# Altium PCB IP5568-MCU-188-3LED-ACL-V1.1.PcbDoc (part 2 of 2)
Units mm, origin at the board's own origin, x right, y up, seen from the top; angles counter-clockwise.
Board outline 55.37 x 39.29 mm, 4 copper layers (Top Layer, Mid-Layer 1, Mid-Layer 2, Bottom Layer); 97 components, 84 nets, 371 pads, 292 vias.
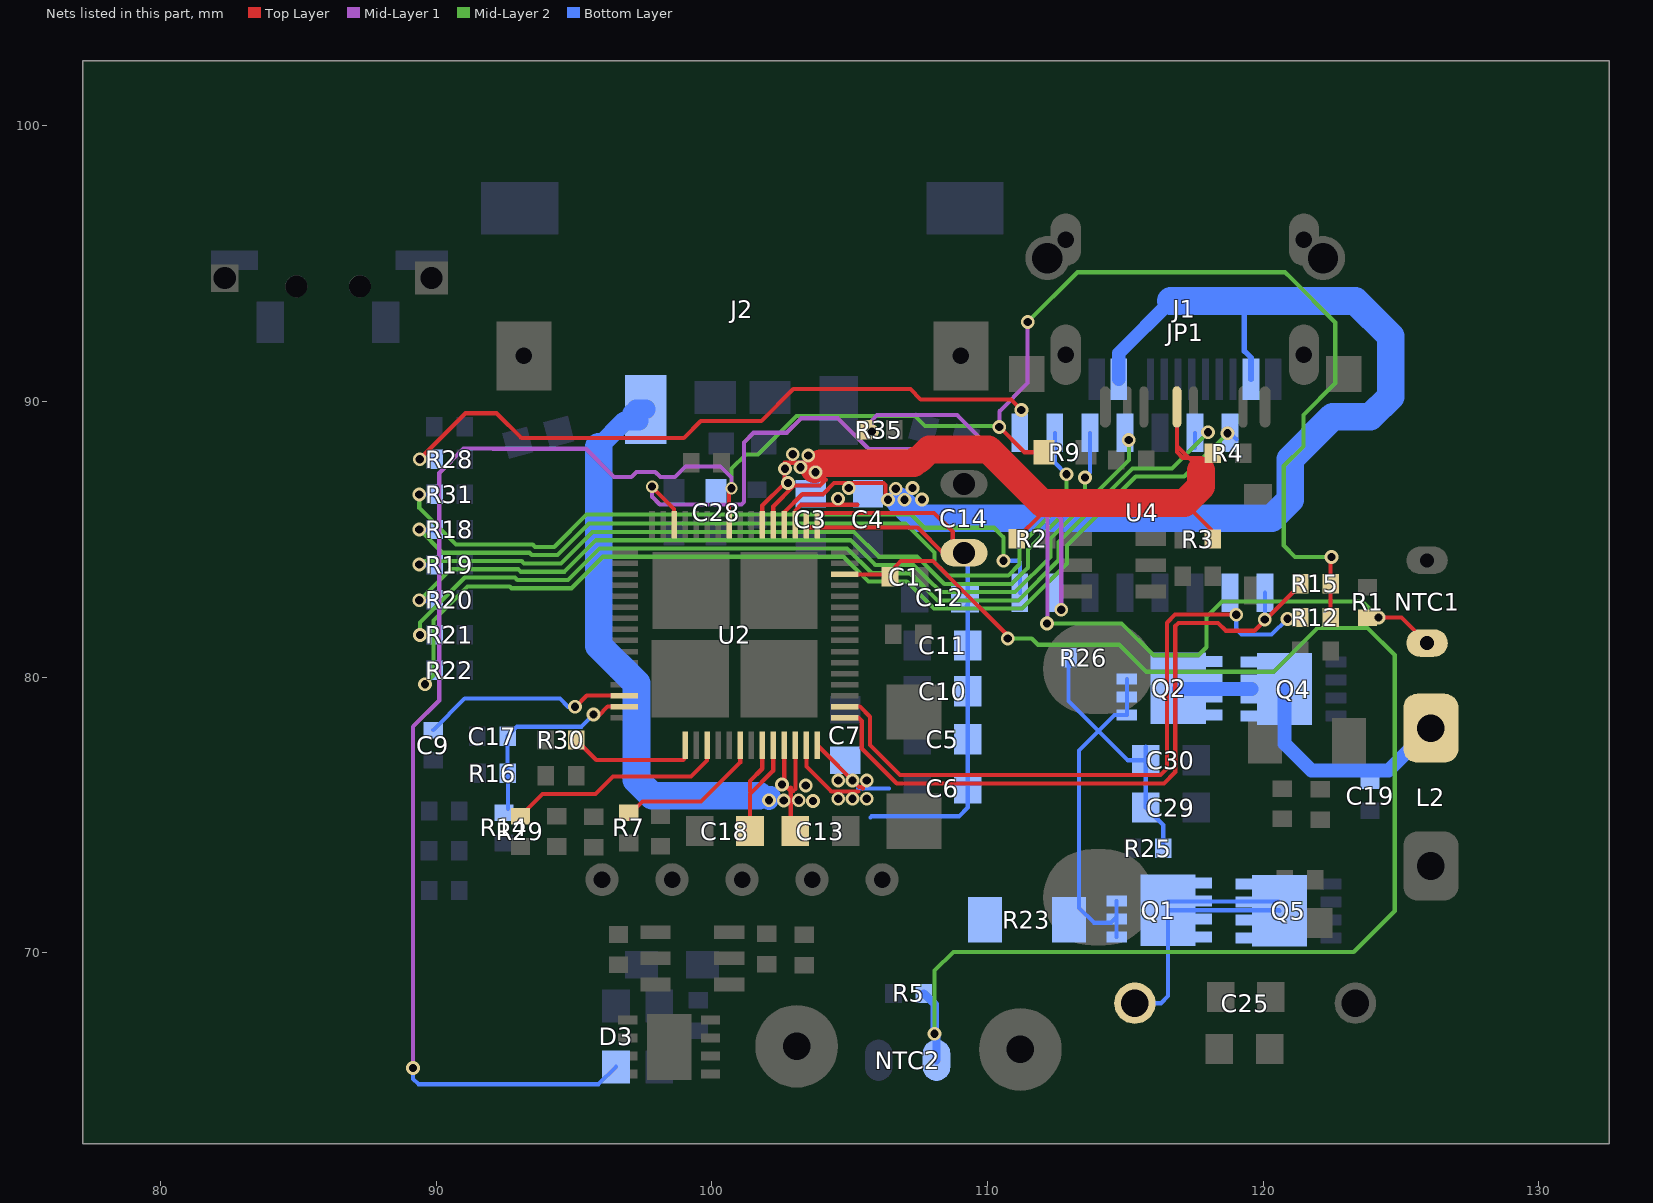
[diagram p4: the nets of this part, all layers, seen from the top]

## Via types
v1: diameter 0.5, hole 0.3, Top Layer to Bottom Layer, tented both sides, 287 vias
v2: diameter 0.45, hole 0.3, Top Layer to Bottom Layer, tented both sides, 5 vias

## Nets (pads, with @x,y where several pads share a name; then routed paths per layer and width w, separated by ;. In a path a pad name is that pad's centre, name@x,y a point inside that pad or via, vN(x,y) a via of type N, cw(c..) or ccw(c..) an arc to the next point about the centre after c; other vN are vias at no path point) (continued)
NTC1: C1.1 NTC2.1 R5.1 U2.14 | length 54.5
  Top Layer w0.15: U2.14@104.825,83.734 106.368,83.734 106.852,84.217 108.023,84.217 108.522,83.719 ; 108.552,83.688 v1@110.731,81.509
  Mid-Layer 2 w0.15: v1(108.077,67.069) 108.077,69.355 108.758,70.035 123.286,70.035 124.773,71.522 124.773,80.802 123.782,81.793 121.963,81.793 120.368,80.197 115.766,80.197 114.785,81.178 111.833,81.178 111.604,81.407 v1(110.731,81.407)
  Bottom Layer w0.3: R5.1@107.687,68.529 108.079,68.137 108.079,67.071 v1(108.077,67.069) ; NTC2.1@108.148,66.103 v1@108.148,67.069
NTC2: NTC1.1 R1.1 U2.30 | length 41.7
  Top Layer w0.15: v2(97.828,86.919) 97.828,86.906 98.625,86.109 U2.30@98.625,85.534 ; R1.1@123.787,82.165 125.021,82.165 NTC1.1@125.946,81.241
  Mid-Layer 1 w0.15: v2(97.828,86.919) 97.828,86.55 98.108,86.271 101.067,86.271 101.161,86.366 101.161,88.521 101.511,88.872 102.712,88.872 103.236,89.395 104.572,89.395 105.689,88.278 107.709,88.278 108.013,88.582 109.402,88.582 112.179,85.805 112.179,81.978 v1(112.154,81.953)
  Mid-Layer 2 w0.15: v1@112.052,82.055 v1@112.09,82.055 ; v1@112.09,81.978 v1@112.135,81.934 ; v1(112.154,81.953) 114.859,81.953 116.014,80.797 117.653,80.797 117.945,81.09 117.945,82.182 118.509,82.746 123.6,82.746 v1(124.181,82.165) ; NTC1.1@125.782,81.241 NTC1.1@125.946,81.241
PWM1: R28.1 U4.1 | length 24.5
  Top Layer w0.15: v1(89.395,87.909) 91.064,89.578 92.184,89.578 93.083,88.679 98.979,88.679 99.593,89.294 101.79,89.294 102.951,90.454 107.201,90.454 107.574,90.081 110.846,90.081 v1(111.227,89.7)
  Bottom Layer w0.15: v1(89.395,87.909) R28.1@89.938,87.909
PWM2: R31.1 U4.16 | length 26.2
  Mid-Layer 2 w0.15: v1(89.383,86.627) 89.383,86.144 90.71,84.817 93.499,84.817 93.586,84.729 94.278,84.729 95.452,85.903 107.232,85.903 107.709,85.425 110.231,85.425 110.579,85.077 v1(110.579,84.226)
  Bottom Layer w0.15: v1@89.391,86.635 R31.1@89.938,86.635 ; R31.1@89.938,86.606 R31.1@89.963,86.606 ; v1(110.579,84.226) 111.112,84.226 111.176,84.163 U4.16@111.176,83.066
PWM3: R35.1 U4.15 | length 12.2
  Mid-Layer 1 w0.15: v1(105.804,88.913) 105.804,89.319 105.994,89.51 108.255,89.51 108.899,89.51 112.674,85.734 v1(112.674,82.448)
SCL: R15.1 U2.1 U4.9 | length 25.4
  Top Layer w0.15: U2.1@104.825,78.5 U2.1@104.825,78.534 105.319,78.534 105.435,78.418 105.435,77.419 106.705,76.149 116.395,76.149 116.809,76.563 116.809,81.854 116.926,81.971 118.359,81.971 118.643,81.686 119.684,81.686 121.345,83.347 R15.1@121.345,83.388
  Bottom Layer w0.15: v1@120.066,82.105 U4.9@120.066,83.066
  other v1: 120.053,82.093
SDA: R12.1 U2.2 U4.10 | length 24.4
  Top Layer w0.15: U2.2@104.825,78.934 104.878,78.934 105.368,78.934 105.735,78.567 105.735,78.105 105.735,77.543 106.83,76.449 116.271,76.449 116.51,76.687 116.51,81.047 116.51,81.978 116.802,82.271 v1(119.024,82.271) ; v1@120.993,82.169 R12.1@121.345,82.169
  Bottom Layer w0.15: v1(119.024,82.271) 119.024,81.737 119.215,81.547 120.307,81.547 v1(120.879,82.118)
SEG1: R18.2 U4.2 | length 29.9
  Mid-Layer 2 w0.15: v1(89.383,85.357) 90.223,84.517 93.374,84.517 93.462,84.429 94.403,84.429 95.546,85.572 107.022,85.572 108.069,84.525 108.069,84.171 108.552,83.688 110.752,83.688 111.163,84.099 111.163,84.763 112.865,86.464 v1(112.865,87.363)
  Bottom Layer w0.15: v1@89.438,85.336 R18.2@89.938,85.336 ; U4.2@112.446,88.866 112.446,87.782 v1(112.865,87.363)
SEG2: R19.2 U4.3 | length 29.8
  Mid-Layer 2 w0.15: v1@89.513,84.217 93.098,84.217 93.186,84.129 94.527,84.129 95.67,85.272 105.153,85.272 106.051,84.374 107.442,84.374 108.428,83.388 110.876,83.388 111.463,83.975 111.463,84.638 113.538,86.713 v1(113.538,87.249)
  Bottom Layer w0.15: v1@89.438,84.066 R19.2@89.938,84.066 ; v1(113.538,87.249) 113.716,87.427 U4.3@113.716,88.866
  other v1: 89.383,84.087
SEG3: R20.2 U4.4 | length 31.2
  Mid-Layer 2 w0.15: v1(89.383,82.791) 90.508,83.917 92.974,83.917 93.061,83.829 94.651,83.829 95.794,84.972 105.029,84.972 105.927,84.074 107.318,84.074 107.805,83.586 108.304,83.088 111,83.088 112.281,84.368 112.281,85.032 115.126,87.876 v1(115.126,88.608) ; v1@115.095,88.608 v1(115.126,88.608) ; v1@115.112,88.594 v1(115.126,88.608)
  Bottom Layer w0.15: v1@89.438,82.77 R20.2@89.963,82.77
SEG4: R21.2 U4.6 | length 35
  Mid-Layer 2 w0.15: v1(89.408,81.534) 89.408,81.992 91.033,83.617 92.85,83.617 92.937,83.529 94.775,83.529 95.918,84.672 97.371,84.672 104.904,84.672 105.803,83.774 107.194,83.774 108.179,82.788 111.125,82.788 112.581,84.244 112.581,84.907 115.252,87.579 116.688,87.579 v1(117.996,88.887)
  Bottom Layer w0.15: v1@89.463,81.513 R21.2@89.988,81.513 ; U4.6@117.526,88.328 U4.6@117.526,88.866
SEG5: R22.2 U4.7 | length 37.1
  Mid-Layer 2 w0.15: v1(89.586,79.743) 89.903,80.061 89.903,82.063 91.132,83.292 92.665,83.292 92.728,83.229 94.9,83.229 96.043,84.372 104.78,84.372 105.679,83.474 107.069,83.474 108.055,82.488 111.249,82.488 112.881,84.12 112.881,84.783 115.377,87.279 117.137,87.279 v1(118.707,88.849)
  Bottom Layer w0.15: v1(89.586,79.743) 89.938,80.095 R22.2@89.938,80.217 ; R22.2@89.938,80.251 R22.2@89.938,80.217 ; R22.2@89.988,80.217 R22.2@89.938,80.217 ; U4.7@118.796,88.866 U4.7@119.029,88.633
SW1: C25.1 Q1.5 Q1.6 Q1.7 Q1.8 Q1.9 Q5.5 Q5.6 Q5.7 Q5.8 Q5.9 | length 12.5
  Bottom Layer w0.15: C25.1@115.342,68.174 116.294,68.174 116.551,68.43 Q1.9@116.551,71.547 120.574,71.547 Q5.9@120.596,71.525 ; Q1.9@116.551,71.865 Q5.9@120.562,71.865
SW2: C19.1 L2.2 Q2.5 Q2.6 Q2.7 Q2.8 Q2.9 Q4.5 Q4.6 Q4.7 Q4.8 Q4.9 | length 11
  Bottom Layer w0.5: Q2.9@116.942,79.576 119.574,79.576 ; Q4.9@120.774,79.576 120.774,77.6 121.755,76.619 124.553,76.619 L2.2@126.086,78.152
UPGATE1: R29.2 U2.54 | length 8.2
  Top Layer w0.15: R29.2@93.053,74.959 93.857,75.763 95.773,75.763 96.407,76.397 99.236,76.397 99.825,76.986 U2.54@99.825,77.534
UPGATE2: R30.2 U2.52 | length 5
  Top Layer w0.15: R30.2@95.076,77.724 95.803,76.997 96.418,76.997 ; 96.215,76.997 96.418,76.997 ; U2.52@99.025,77.534 99.025,77.064 98.958,76.997 96.418,76.997
V_DECODE: C9.1 U2.46 | length 7.7
  Top Layer w0.15: v1@95.044,78.92 95.458,79.334 U2.46@96.825,79.334
  Bottom Layer w0.15: C9.1@89.891,78.083 91.03,79.223 94.489,79.223 94.781,78.93 v1(95.034,78.93)
V_DET: C17.2 R14.1 R16.2 U2.47 | length 7.1
  Top Layer w0.15: v1@95.885,78.6 96.219,78.934 U2.47@96.825,78.934
  Bottom Layer w0.15: R16.2@92.587,76.53 C17.2@92.587,77.864 92.93,78.207 95.263,78.207 v1(95.707,78.651) ; R14.1@92.6,75.23 R16.2@92.6,76.517
VBRIGE: C29.2 C30.2 Q1.1 Q1.2 Q1.3 Q2.1 Q2.2 Q2.3 R23.2 R25.2 R26.2 | length 22.3
  Bottom Layer w0.15: R26.2@112.937,80.709 112.937,79.138 114.027,78.048 ; 113.322,76.556 113.322,75.73 ; Q1.1@114.684,70.577 Q1.2@114.684,71.227 Q1.3@114.684,71.877 ; Q1.2@114.684,71.295 114.484,71.095 113.855,71.095 113.322,71.628 113.322,75.73 ; Q2.3@115.053,79.929 Q2.2@115.053,79.279 Q2.1@115.053,78.628 114.608,78.628 114.027,78.048 ; C30.2@115.738,77.48 C30.2@115.738,76.987 ; R25.2@116.374,73.8 116.374,74.637 C29.2@115.738,75.273 C30.2@115.738,76.987 ; 113.322,75.73 113.322,77.343 114.027,78.048 ; 114.027,78.048 115.087,76.987 C30.2@115.738,76.987
VBUS: C4.1 J1.A4 J1.B4 U2.19 U2.20 | length 45.4
  Top Layer w0.15: U2.20@102.625,85.534 102.625,85.988 103.276,86.639 104.026,86.639 104.432,87.046 106.223,87.046 106.299,86.97 v1@106.299,86.552 ; 103.025,86.052 103.232,86.259 105.283,86.259
  Bottom Layer w0.2: 119.405,93.65 119.318,93.563 119.318,91.832 119.557,91.593 J1.B4@119.557,90.816
  Bottom Layer w0.5: J1.A4@114.757,90.816 114.757,91.753 116.654,93.65
  Bottom Layer w1: v1@106.808,86.387 107.432,85.763 120.307,85.763 120.981,86.437 120.981,87.91 122.517,89.446 123.888,89.446 124.625,90.183 124.625,92.367 123.342,93.65 119.405,93.65 116.654,93.65
  other v1: 106.388,86.436 106.985,86.436 104.572,86.474 107.62,86.449 106.667,86.843 104.965,86.868 107.277,86.868
VCC: C28.1 D3.K R9.1 R12.2 R15.2 U2.25 | length 87.1
  Top Layer w0.15: U2.25@100.625,85.534 v2@100.625,86.693 ; v1(110.426,89.078) 111.341,88.163 R9.1@112.039,88.163 R9.1@112.331,87.871 ; R12.2@122.445,82.169 122.445,82.779 R15.2@122.445,83.388 v1@122.445,84.366
  Mid-Layer 1 w0.15: v1(89.154,65.824) 89.154,78.207 90.106,79.159 90.106,87.414 90.99,88.298 92.051,88.298 92.058,88.29 95.428,88.29 96.449,87.269 97.075,87.269 97.258,87.452 97.942,87.452 98.134,87.261 98.653,87.261 99.035,87.643 100.317,87.643 100.711,87.249 v2(100.711,86.855) ; v1(110.426,89.078) 110.426,89.649 111.455,90.678 v1(111.455,92.888)
  Mid-Layer 2 w0.15: v2(100.711,86.855) 100.711,87.566 101.23,88.086 101.665,88.086 103.063,89.484 107.365,89.484 107.733,89.116 v1@110.388,89.116 ; v1(111.455,92.888) 113.261,94.693 115.715,94.693 120.793,94.693 121.003,94.483 122.614,92.872 122.614,90.668 121.458,89.512 121.458,88.379 120.747,87.668 120.747,84.777 121.158,84.366 v1(122.479,84.366)
  Bottom Layer w0.15: v1(89.154,65.824) 89.154,65.43 89.349,65.236 95.889,65.236 D3.K@96.52,65.867
VIN: C3.1 JP1.6 R2.2 R3.2 R4.2 U2.21 U2.22 | length 31.9
  Top Layer w0.15: U2.22@101.825,85.534 101.825,86.23 102.629,87.033 102.629,87.782 103.51,87.782 103.73,87.563 104.127,87.165 103.919,86.957 102.984,86.957 102.225,86.198 U2.21@102.225,85.534 U2.21@102.235,85.544 ; R2.2@111.058,85.026 111.974,85.942 111.974,86.322 ; 117.145,86.322 118.177,85.289 R3.2@118.177,85.014 ; 117.745,87.513 116.87,88.387 JP1.6@116.87,89.807 116.87,88.171 117.081,87.96 117.745,87.96
  Top Layer w1: v1@103.721,87.554 103.73,87.563 103.938,87.771 107.315,87.771 107.43,87.886 107.51,87.886 107.887,88.263 110.032,88.263 111.974,86.322 117.145,86.322 117.745,86.922 117.745,87.513
  other v1: 102.756,87.046 103.759,87.439 102.654,87.566 103.213,87.617 103.492,88.049 102.933,88.087
VOUT1: C13.2 J2.4 U2.61 U2.62 | length 25.3
  Top Layer w0.15: U2.61@102.625,77.534 102.625,76.102 102.794,75.933 ; 102.857,75.997 102.857,75.882 ; 102.959,75.882 102.857,75.882 ; 102.965,75.889 103.025,75.949 ; C13.2@102.974,74.473 102.857,74.59 102.857,75.882 ; 103.025,75.997 U2.62@103.025,77.534
  Bottom Layer w0.7: 95.898,88.367 96.825,89.294 J2.4@97.346,89.294 ; J2.4@97.085,89.554 97.251,89.72 J2.4@97.605,89.72 ; 101.714,75.705 102.133,75.705 102.07,75.641 v1(102.07,75.54)
  Bottom Layer w1: 95.898,88.367 95.898,81.143 97.263,79.778 97.263,76.281 97.839,75.705 101.714,75.705
  other v1: 103.67,75.514 102.603,75.527 103.149,75.54 103.403,76.073 102.54,76.111
VOUT2: C18.2 U2.59 U2.60 | length 5.3
  Top Layer w0.15: C18.2@101.381,74.422 101.381,75.765 102.225,76.609 U2.60@102.225,77.534 ; 101.381,75.854 101.381,76.235 101.825,76.679 U2.59@101.825,77.534
VSET: R7.1 U2.57 | length 5.5
  Top Layer w0.15: R7.1@96.926,75.074 97.057,75.074 97.481,75.497 99.609,75.497 101.025,76.913 U2.57@101.025,77.534
VSYS: C5.2 C6.2 C7.2 C10.2 C11.2 C12.1 C14.1 R23.1 U2.17 U2.18 U2.63 U2.64 | length 32.4
  Top Layer w0.15: U2.63@103.425,77.534 103.425,76.762 104.331,75.857 105.308,75.857 ; U2.18@103.425,85.534 103.526,85.433 107.467,85.433 108.387,84.513 C14.1@109.144,84.513 108.737,84.919 108.737,85.281 108.059,85.959 103.886,85.959 103.825,85.898 U2.17@103.825,85.534 ; U2.64@103.825,77.534 105.337,76.022 105.474,76.022 105.474,75.959
  Bottom Layer w0.15: 105.308,75.959 106.426,75.959 ; 105.753,74.917 105.791,74.955 108.966,74.955 109.281,75.27 C11.2@109.281,81.153 ; C14.1@109.144,84.513 109.281,84.376 C12.1@109.281,82.588 ; C12.1@109.233,82.54 C12.1@109.233,82.588 ; C11.2@109.281,80.835 C11.2@109.281,81.153 ; C12.1@109.281,82.54 C11.2@109.281,81.153
  other v1: 104.584,75.59 105.099,75.59 105.613,75.59 104.584,76.251 105.099,76.251 105.613,76.251
pads on no net: J1.0@114.267,92.134 J1.0@120.047,92.134 J1.A8 J1.B8 JP1.3 JP1.4 JP1.7 Q3.0 U1.3 U1.4 U2.15 U2.16 U2.49 U2.50 U2.51 U3.4 U4.8

## Polygon pours and split planes (outlines as drawn)
GND on Top Layer "Bottom Layer-No Net" (hatched Vertical grid 0.2 track 0.3, remove dead copper, pour order 1000): 131.381,100.99 76.124,100.99 75.171,100.038 75.641,99.568 75.641,99.085 75.641,63.741 77.165,62.217 77.356,62.027 77.546,62.027 130.327,62.027 133.566,65.265
COIL_V on Top Layer "Top Layer-No Net" (hatched 45Degree grid 0.2 track 0.3, remove dead copper, pour order 1020): 125.235,74.447 126.848,74.447 127.178,74.117 127.178,64.694 126.898,64.414 122.923,64.414 122.377,64.96 122.377,68.021 123.558,69.202 125.146,70.79 125.146,74.244
COIL_I on Top Layer "Top Layer-No Net" (hatched 45Degree grid 0.2 track 0.3, remove dead copper, pour order 1019): 123.419,80.543 122.987,80.543 122.339,79.896 122.339,77.559 122.39,77.508 122.822,77.076 123.228,77.076 123.228,77.406 123.469,77.648 123.317,77.8 123.317,79.362
COIL_I on Top Layer "Top Layer-No Net" (hatched 45Degree grid 0.2 track 0.3, remove dead copper, pour order 1018): 124.511,81.394 123.317,81.394 123.304,81.382 123.152,81.229 123.152,80.937 123.152,80.696 122.809,80.353 122.669,80.213 122.669,79.692 122.669,77.102 122.847,76.924 123.038,76.733 123.038,76.352 123.038,73.965 122.771,73.698 122.555,73.482 122.555,72.949 122.555,71.755 122.872,71.438 124.231,71.438 124.549,71.755 124.701,71.907 124.701,73.533 124.701,81.204 124.511,81.394
VIN on Top Layer "Top Layer-No Net" (hatched 45Degree grid 0.2 track 0.3, remove dead copper, pour order 1017): 117.437,88.24 117.005,88.24 116.23,89.014 116.23,90.322 116.408,90.5 116.967,90.5 117.056,90.411 117.056,89.052 117.119,88.989
VIN on Top Layer "Top Layer-No Net" (hatched 45Degree grid 0.2 track 0.3, remove dead copper, pour order 1016): 104.889,87.655 105.461,88.227 106.236,88.227 107.226,88.227 107.645,88.646 110.223,88.646 110.401,88.468 112.128,86.741 114.211,86.741 116.002,86.741 116.51,87.249 116.51,90.183 116.751,90.424 117.018,90.424 117.132,90.31 117.132,88.773 117.373,88.532 117.78,88.532 118.135,88.176 118.135,85.547 118.415,85.268 117.97,85.268 117.615,85.623 117.45,85.788 116.053,85.788 111.798,85.788 111.62,85.611 111.277,85.268 111.036,85.268 111.011,85.268 110.782,85.496 110.782,86.83 110.363,87.249 109.753,87.859 109.182,87.859 108.077,87.859 107.747,87.528 107.721,87.503 105.753,87.503
VSYS on Top Layer "Top Layer-No Net" (hatched 45Degree grid 0.2 track 0.3, remove dead copper, pour order 1015): 104.877,85.433 105.169,85.141 105.613,85.141 107.912,85.141 108.013,85.242 107.455,85.801 106.439,85.801
VSYS on Top Layer "Top Layer-No Net" (hatched 45Degree grid 0.2 track 0.3, remove dead copper, pour order 1014): 105.093,86.081 103.556,86.081 103.353,85.877 103.353,85.192 103.403,85.141 105.651,85.141 105.88,85.369 106.566,85.369 106.87,85.065 107.531,85.065 108.496,84.099 108.737,83.858 109.931,83.858 109.931,85.623 109.69,85.865 109.563,85.992 107.417,85.992 105.245,85.992 105.207,86.03
VBUS on Top Layer "Top Layer-No Net" (hatched 45Degree grid 0.2 track 0.3, remove dead copper, pour order 1013): 105.258,86.639 105.639,87.02 106.439,87.02 107.62,87.02 107.836,86.804 107.836,86.373 107.696,86.233 105.016,86.233 104.864,86.385
VBUS on Top Layer "Top Layer-No Net" (hatched 45Degree grid 0.2 track 0.3, remove dead copper, pour order 1012): 103.848,86.677 103.149,86.677 102.946,86.474 102.489,86.017 102.489,85.585 102.489,85.23 102.527,85.192 102.959,85.192 102.997,85.23 102.997,86.131 103.162,86.296 106.515,86.296 106.54,86.271 106.54,86.995 106.439,87.097 106.324,86.982 104.203,86.982
VIN on Top Layer "Top Layer-No Net" (hatched 45Degree grid 0.2 track 0.3, remove dead copper, pour order 1011): 106.655,87.884 106.274,88.265 104.851,88.265 102.514,88.265 102.057,87.808 102.057,86.995 101.879,86.817 101.689,86.627 101.689,85.331 101.702,85.331 101.841,85.192 102.095,85.192 102.146,85.242 102.146,86.296 102.641,86.792 102.908,87.058 103.848,87.058 104.28,87.49 104.775,87.49 105.715,87.49 105.753,87.528
B+ on Top Layer "Top Layer-No Net" (hatched 45Degree grid 0.2 track 0.3, remove dead copper, pour order 1010): 100.863,85.179 101.282,85.179 101.333,85.23 101.333,86.754 101.74,87.16 101.803,87.224 101.803,87.325 101.765,87.325 101.295,86.855 100.851,86.411 100.851,85.192
LX on Top Layer "Top Layer-No Net" (hatched 45Degree grid 0.2 track 0.3, remove dead copper, pour order 1009): 104.927,80.772 104.927,81.013 105.194,81.28 106.244,81.28 106.668,80.856 106.668,77.368 106.909,77.127 106.337,77.127 106.134,77.33 106.134,78.321 105.88,78.575 105.182,79.273 105.182,80.009
LX on Top Layer "Top Layer-No Net" (hatched 45Degree grid 0.2 track 0.3, remove dead copper, pour order 1008): 113.043,81.915 115.519,81.915 116.18,81.255 116.18,77.178 115.951,76.949 107.023,76.949 106.324,77.648 106.324,79.057 105.943,79.438 105.651,79.731 104.584,79.731 104.457,79.731 104.445,79.743 104.445,81.153 104.572,81.28 105.385,81.28 105.664,81.001 105.753,80.912 107.201,80.912 107.582,81.293 108.026,81.293 109.296,81.293 110.604,79.985 111.925,79.985 112.306,80.366
VSYS on Top Layer "Top Layer-No Net" (hatched 45Degree grid 0.2 track 0.3, remove dead copper, pour order 1007): 105.842,75.413 104.61,75.413 104.089,75.933 103.403,76.619 103.403,77.127 103.403,77.838 103.429,77.864 104.457,77.864 105.397,76.924 105.969,76.352 105.969,76.124 105.969,75.565 105.804,75.4
VOUT1 on Top Layer "Top Layer-No Net" (hatched 45Degree grid 0.2 track 0.3, remove dead copper, pour order 1006): 103.594,74.092 102.324,74.092 102.248,74.168 102.248,74.93 101.778,75.4 101.778,75.768 102.171,76.162 102.552,76.543 102.552,77.851 102.946,77.851 102.972,77.826 102.972,76.619 103.607,75.984 103.759,75.832 103.759,75.171 103.759,74.27 103.607,74.117
VOUT2 on Top Layer "Top Layer-No Net" (hatched 45Degree grid 0.2 track 0.3, remove dead copper, pour order 1005): 101.778,73.901 100.914,73.901 100.838,73.977 100.838,75.895 101.486,76.543 101.727,76.784 101.727,77.864 102.133,77.864 102.197,77.8 102.197,76.67 101.613,76.086 101.473,75.946 101.473,74.854 101.473,74.422 101.625,74.27
BAT- on Top Layer "Top Layer-No Net" (hatched 45Degree grid 0.2 track 0.3, remove dead copper, pour order 1004): 100.611,67.234 100.611,67.945 101.678,69.012 103.532,69.012 104.091,69.571 106.11,69.571 107.101,68.58 107.101,65.075 106.504,64.478 106.364,64.618 102.922,64.618
BAT- on Top Layer "Top Layer-No Net" (hatched 45Degree grid 0.2 track 0.3, remove dead copper, pour order 1003): 102.07,71.069 99.555,71.069 99.352,70.866 99.352,68.669 99.873,68.148 100.047,67.974 100.6,67.974 100.6,68.33 100.711,68.44 100.127,68.44 99.822,68.745 99.822,70.294 99.974,70.447 102.095,70.447 102.171,70.523
BAT- on Top Layer "Top Layer-No Net" (hatched 45Degree grid 0.2 track 0.3, remove dead copper, pour order 1002): 99.72,64.96 99.72,67.094 99.809,67.183 100.444,67.183 100.533,67.272 100.533,68.135 100.8,68.402 106.439,68.402 106.731,68.11 106.731,64.618 106.756,64.592
B+ on Top Layer "Top Layer-No Net" (hatched 45Degree grid 0.2 track 0.3, remove dead copper, pour order 1001): 116.891,68.186 116.891,68.783 116.053,69.621 114.846,70.828 113.347,70.828 113.347,71.133 114.16,71.945 114.162,71.944 116.712,71.944 116.712,71.909 117.424,71.196 117.729,70.891 117.729,68.682
B+ on Top Layer "Top Layer-No Net" (hatched 45Degree grid 0.2 track 0.3, remove dead copper, pour order 1000): 109.83,64.843 109.83,68.021 109.969,68.161 112.992,68.161 114.021,67.132 116.408,67.132 116.535,67.259 116.535,70.193 116.383,70.345 112.166,70.345 111.569,70.942 111.569,72.873 112.459,73.762 117.945,73.762 118.466,73.241 120.637,73.241 120.942,72.936 120.942,71.018 120.206,70.282 119.926,70.282 119.342,69.698 119.101,69.456 119.101,68.682 119.101,63.995 118.643,63.538
GND on Mid-Layer 2 "Bottom Layer-No Net" (hatched Vertical grid 0.2 track 0.3, remove dead copper, pour order 1001): 131.28,101.841 78.791,101.841 77.267,100.317 78.118,99.466 78.118,97.752 78.118,63.068 80.785,60.401 80.975,60.592 127.368,60.592 131.47,64.694 131.47,66.307 131.47,100.889 133.286,102.705
COIL_I on Mid-Layer 2 "Top Layer-No Net" (hatched 45Degree grid 0.2 track 0.3, remove dead copper, pour order 1024): 123.19,73.508 122.061,72.378 122.061,71.868 122.061,71.31 122.288,71.082 122.377,71.171 123.393,71.171 123.393,71.247 123.419,71.272
COIL_I on Mid-Layer 2 "Top Layer-No Net" (hatched 45Degree grid 0.2 track 0.3, remove dead copper, pour order 1023): 122.618,71.641 122.898,71.361 122.898,71.349 123.584,71.349 124.13,71.895 124.13,81.382 123.927,81.585 122.771,81.585 122.415,81.229 122.047,80.861 122.047,74.193 122.047,71.882 122.364,71.564
B+ on Mid-Layer 2 "Top Layer-No Net" (hatched 45Degree grid 0.2 track 0.3, remove dead copper, pour order 1022): 109.69,63.297 109.69,67.958 109.931,68.199 112.801,68.199 113.64,67.361 113.944,67.056 116.383,67.056 116.599,67.272 116.599,69.456 119.177,69.456 119.215,69.494 119.215,64.795 118.58,64.16
GND on Mid-Layer 1 "Bottom Layer-No Net" (hatched Vertical grid 0.2 track 0.3, remove dead copper, pour order 1002): 113.462,98.222 80.886,98.222 77.267,94.602 77.838,94.031 77.838,92.697 77.838,65.926 80.594,63.17 130.15,63.17 135.001,68.021 134.62,68.021 134.62,91.453 130.518,95.555
B+ on Mid-Layer 1 "Top Layer-No Net" (hatched 45Degree grid 0.2 track 0.3, remove dead copper, pour order 1025): 109.791,63.995 109.677,64.11 109.677,67.996 109.944,68.263 110.998,68.263 112.81,68.263 113.729,67.343 113.953,67.12 116.218,67.12 116.625,67.527 116.625,69.485 118.957,69.485 119.101,69.342 119.101,64.63 118.923,64.453
GND on Bottom Layer "Bottom Layer-No Net" (hatched Vertical grid 0.2 track 0.3, remove dead copper, pour order 1006): 128.549,101.143 81.102,101.143 77.521,97.561 77.737,97.346 77.737,96.418 77.737,68.212 82.169,63.779 129.197,63.779 131.991,66.573 131.991,96.622 129.197,99.416
VBRIGE on Bottom Layer "Bottom Layer-No Net" (hatched Vertical grid 0.2 track 0.3, remove dead copper, pour order 1005): 113.119,80.95 112.751,80.95 112.141,80.34 112.116,80.315 112.116,80.251 112.116,78.867 111.989,78.74 111.989,70.561 112.319,70.231 113.322,70.231 114.021,70.929 114.021,78.981 113.97,79.032
VSYS on Bottom Layer "Bottom Layer-No Net" (hatched Vertical grid 0.2 track 0.3, remove dead copper, pour order 1004): 106.426,75.794 106.426,77.229 106.07,77.584 104.381,77.584 104.267,77.47 104.267,74.193 104.699,73.762 104.851,73.914 105,73.914 108.128,73.914 108.42,73.622 108.852,73.19 108.852,71.399 108.852,70.498 109.042,70.307 109.156,70.421 109.258,70.421 111.163,70.421 111.392,70.65 111.404,70.663 111.404,71.45 111.404,79.324 110.477,80.251 110.071,80.251 109.703,79.883 109.703,79.692 109.703,77.305 109.931,77.076 109.931,76.746 109.931,75.629 109.068,74.765 107.508,74.765 107,74.257 106.962,74.219 106.769,74.219 106.274,74.219 106.108,74.384
VSYS on Bottom Layer "Bottom Layer-No Net" (hatched Vertical grid 0.2 track 0.3, remove dead copper, pour order 1003): 108.356,85.103 109.652,85.103 109.944,84.811 109.906,84.772 109.906,84.569 110.299,84.176 110.299,81.445 110.299,80.581 110.68,80.2 110.68,80.124 110.68,78.88 110.795,78.765 110.757,78.727 110.757,78.308 110.757,75.298 110.757,74.32 109.982,73.546 109.766,73.762 108.648,73.762 104.61,73.762 104.407,73.965 104.661,74.219 104.661,74.765 104.661,77 104.419,77.241 104.445,77.216 104.737,77.216 106.045,77.216 106.134,77.127 106.236,77.025 106.236,76.441 107.518,75.159 108.356,75.159 108.775,75.578 108.775,77.356 108.775,77.597 108.775,83.096 108.356,83.515
COIL_I on Bottom Layer "Top Layer-No Net" (hatched 45Degree grid 0.2 track 0.3, remove dead copper, pour order 1043): 122.174,79.045 123.876,79.045 124.32,79.489 124.32,81.229 123.698,81.852 122.542,81.852 122.161,81.471 122.161,79.184 122.276,79.07
VBUS on Bottom Layer "Top Layer-No Net" (hatched 45Degree grid 0.2 track 0.3, remove dead copper, pour order 1042): 115.087,91.465 115.087,91.516 116.129,92.558 116.786,93.215 116.786,93.366 116.248,93.366 116.243,93.37 115.164,92.291 115.164,92.011
COIL_V on Bottom Layer "Top Layer-No Net" (hatched 45Degree grid 0.2 track 0.3, remove dead copper, pour order 1041): 127.889,75.4 123.698,75.4 123.546,75.248 123.546,74.486 123.736,74.295 124.041,73.99 124.041,73.406 124.041,70.688 123.266,69.913 122.098,68.745 122.098,67.539 122.098,67.285 122.161,67.221 127.178,67.221 127.584,67.627
COIL_I on Bottom Layer "Top Layer-No Net" (hatched 45Degree grid 0.2 track 0.3, remove dead copper, pour order 1040): 121.92,71.031 123.546,71.031 123.749,71.234 123.749,73.736 122.936,74.549 120.574,74.549 120.155,74.968 120.155,77.33 119.812,77.673 117.335,77.673 116.942,77.279 116.942,73.863 117.526,73.279 121.425,73.279 121.945,72.758 121.945,71.183 121.933,71.171
SW2 on Bottom Layer "Top Layer-No Net" (hatched 45Degree grid 0.2 track 0.3, remove dead copper, pour order 1039): 128.054,79.337 125.006,79.337 124.689,79.019 124.689,77.978 121.958,77.978 121.844,78.092 121.844,80.62 121.704,80.759 116.129,80.759 116.002,80.632 116.002,78.41 116.116,78.295 119.825,78.295 120.078,78.041 120.307,77.813 120.307,76.746 120.307,76.314 120.802,75.819 128.283,75.819 128.333,75.87
SW1 on Bottom Layer "Top Layer-No Net" (hatched 45Degree grid 0.2 track 0.3, remove dead copper, pour order 1038): 118.593,70.574 118.123,70.574 117.018,69.469 116.425,68.876 116.425,68.554 116.425,70.596 116.332,70.688 116.611,70.968 116.611,71.247
SW1 on Bottom Layer "Top Layer-No Net" (hatched 45Degree grid 0.2 track 0.3, remove dead copper, pour order 1037): 116.472,67.043 114.833,67.043 114.49,67.386 114.49,68.897 115.303,69.71 115.341,69.748 115.341,70.65 115.341,72.453 115.57,72.682 121.463,72.682 121.475,72.669 121.475,70.472 121.349,70.345 117.17,70.345 116.738,69.913 116.738,67.246 116.484,66.992
VBRIGE on Bottom Layer "Top Layer-No Net" (hatched 45Degree grid 0.2 track 0.3, remove dead copper, pour order 1036): 113.424,78.994 113.424,80.81 113.259,80.975 112.852,80.975 112.751,80.874 112.751,79.477 113.005,79.223
VBRIGE on Bottom Layer "Top Layer-No Net" (hatched 45Degree grid 0.2 track 0.3, remove dead copper, pour order 1035): 115.341,80.01 113.284,80.01 112.878,79.604 112.878,72.377 112.166,71.666 112.166,70.383 112.306,70.244 114.884,70.244 114.91,70.269 114.91,71.831 114.846,71.895 114.211,71.895 114.033,72.072 114.033,74.739 114.325,75.032 115.291,75.032 115.506,74.816 116.027,74.295 116.027,73.596 116.395,73.596 116.446,73.546 116.446,77.381 115.837,77.991 115.519,77.991 115.303,78.207 115.341,78.245 115.341,80.01
VOUT1 on Bottom Layer "Top Layer-No Net" (hatched 45Degree grid 0.2 track 0.3, remove dead copper, pour order 1034): 99.809,75.489 99.504,75.184 97.193,75.184 96.596,75.781 96.596,78.13 96.596,79.4 95.479,80.518 95.225,80.772 95.225,81.483 96.291,81.483 96.787,80.988 97.701,80.073 97.701,79.477 97.701,77.343 98.311,76.733 99.111,75.933 99.111,75.844
VOUT1 on Bottom Layer "Top Layer-No Net" (hatched 45Degree grid 0.2 track 0.3, remove dead copper, pour order 1033): 97.282,88.862 97.282,88.608 96.088,87.414 95.618,86.944 95.618,86.919 95.618,88.722 95.987,89.09 96.253,89.357 96.253,89.421
VOUT1 on Bottom Layer "Top Layer-No Net" (hatched 45Degree grid 0.2 track 0.3, remove dead copper, pour order 1032): 98.552,90.932 96.355,90.932 95.225,89.802 95.225,81.09 95.987,80.328 96.787,79.527 96.787,78.372 96.787,75.565 97.193,75.159 103.683,75.159 103.759,75.235 103.759,76.429 103.53,76.657 98.158,76.657 97.765,77.051 97.676,77.14 97.676,79.781 96.355,81.102 96.355,82.08 96.355,88.201 96.71,88.557 98.59,88.557 98.615,88.532 98.615,90.669 98.4,90.885
VIN on Bottom Layer "Top Layer-No Net" (hatched 45Degree grid 0.2 track 0.3, remove dead copper, pour order 1028): 102.806,86.22 103.988,86.22 104.102,86.335 104.102,87.757 103.683,88.176 103.035,88.176 102.578,87.719 102.552,87.694 102.552,87.274 102.552,86.462 102.781,86.233
VBUS on Bottom Layer "Top Layer-No Net" (hatched 45Degree grid 0.2 track 0.3, remove dead copper, pour order 1027): 119.278,90.691 119.278,88.113 119.57,87.82 120.548,86.843 120.637,86.843 121.526,87.732 121.526,88.862 121.526,89.192 121.336,89.383 120.942,89.776 120.015,89.776 119.786,90.005 119.786,90.259 119.786,90.868 119.634,91.021
VBUS on Bottom Layer "Top Layer-No Net" (hatched 45Degree grid 0.2 track 0.3, remove dead copper, pour order 1026): 107.544,87.236 104.8,87.236 104.483,86.919 104.483,86.119 104.61,85.992 106.248,85.992 106.743,85.496 106.909,85.331 109.309,85.331 120.65,85.331 121.552,86.233 121.552,87.808 122.047,88.303 122.555,88.811 123.66,88.811 124.282,88.811 125.031,89.56 125.031,93.256 124.473,93.815 124.257,94.031 120.269,94.031 116.268,94.031 115.227,92.989 114.567,92.329 114.567,91.376 114.567,90.361 114.783,90.145 115.494,90.145 115.633,90.284 115.633,92.278 116.383,93.027 116.459,93.104 119.189,93.104 119.24,93.053 119.24,90.742 119.24,90.335 119.342,90.233 119.355,90.221 119.596,90.221 119.596,92.164 120.053,92.621 120.587,93.154 121.183,93.154 122.263,93.154 122.669,92.748 122.669,90.399 122.111,89.84 120.18,87.909 120.18,87.249 120.18,86.843 119.837,86.5 108.179,86.5 107.556,87.122

## Keep-outs
Keep-Out Layer:
  circle w0.127: c93.066,68.961 r1.25
  circle w0.127: c123.066,86.961 r1.25
  lines w0.127: 94.266,98.294 ccw(c98.292,-3.698) 93.083,98.241 88.713,95.277 81.366,95.277 78.866,92.777 78.866,86.843 88.523,86.843 88.523,64.843 127.156,64.843 127.156,93.813 ccw(c119.895,80.291) 125.817,94.45 cw(c126.707,96.571) 124.812,95.267 124.601,95.574 ccw(c123.201,94.61) 123.862,96.177 ; 94.336,97.32 94.336,98.311 94.348,98.323 ; 107.855,97.688 107.855,98.292 107.899,98.336 ; 107.866,98.295 cw(c103.912,-2.08) 111.96,98.049 ; 111.874,98.057 121.638,96.761 ; 121.638,96.741 121.985,96.666 122.815,96.47 123.459,96.303 123.901,96.164

## Other copper
Top Layer:
  rectangle net NetD8_A: 106.782,88.722 107.15,88.989
  pour cut-out: 120.51,76.429 120.32,76.429 119.926,76.035 119.926,74.536 120.117,74.346 120.409,74.346 120.782,74.719 120.782,76.452
  pour cut-out: 97.561,78.797 98.641,78.797 98.996,78.442 98.996,77.387 98.806,77.197 96.749,77.197 96.368,77.578 96.368,78.835
  pour cut-out: 120.307,77.089 119.926,76.708 119.926,75.819 120.167,75.578 120.351,75.065 120.445,75.504 120.561,75.387 120.574,75.832 120.574,76.962
  pour cut-out: 121.73,77.089 121.844,77.203 122.669,77.203 122.86,77.013 122.86,74.803 122.453,74.397 122.301,74.549 121.437,74.549
  pour cut-out: 121.094,74.625 120.117,74.625 120.078,74.663 120.078,76.987 120.294,77.203 122.364,77.203 122.555,77.013 122.555,74.651 122.377,74.473 121.272,74.473 121.133,74.612
Bottom Layer:
  region net VSYS: 111.519,70.688 108.725,70.688 108.725,70.066 111.519,70.066
  rectangle net NetC27_1: 98.615,86.309 99.428,87.198
  rectangle net VCC: 99.771,86.296 100.952,87.401
  rectangle net B+: 101.206,86.411 102.121,87.668
  rectangle net SEG4: 117.589,88.544 118.034,89.154
  rectangle net VBUS: 114.529,91.173 115.049,92.558
  rectangle net VBUS: 119.318,91.376 119.837,93.205
  pour cut-out: 113.462,67.132 114.033,67.704 114.567,67.704 114.567,67.462 115.087,66.942 115.087,66.319
  pour cut-out: 108.636,63.729 108.636,69.164 108.712,69.24 110.566,69.24 110.947,68.859 110.947,64.884 109.918,63.856
  pour cut-out: 93.523,100.228 93.523,98.12 92.443,97.041 92.266,97.218 88.837,97.218 88.837,100.495 88.9,100.559

## Silkscreen, mask and mechanical layers (free items; w line width, h text height)
Top Overlay:
  circle w0.127: c123.066,86.961 r2.25
  circle w0.127: c93.066,68.961 r2.25
  rectangle: 109.068,73.825 119.189,78.689
  rectangle: 121.73,67.158 125.082,69.469
  rectangle: 113.716,66.789 117.081,69.126
  rectangle: 94.971,71.285 106.985,73.241
  lines w0.127: 93.083,98.241 cw(c98.292,-3.698) 94.266,98.294 94.266,90.737 107.866,90.737 107.866,98.295 ; 94.266,90.937 107.866,90.937 ; 94.266,92.237 94.466,92.237 ; 94.266,96.437 94.466,96.437 ; 94.266,97.937 94.466,97.937 ; 94.466,90.937 94.466,99.437 107.666,99.437 107.666,90.937 ; 94.966,90.937 94.966,99.437 ; 97.266,90.737 97.266,90.937 ; 97.266,90.887 97.866,90.887 ; 97.866,90.737 97.866,90.937 ; 99.766,90.737 99.766,90.937 ; 99.766,90.887 100.366,90.887 ; 100.366,90.737 100.366,90.937 ; 101.766,90.737 101.766,90.937 ; 101.766,90.887 102.366,90.887 ; 102.366,90.737 102.366,90.937 ; 104.266,90.737 104.266,90.937 ; 104.266,90.887 104.866,90.887 ; 104.866,90.737 104.866,90.937 ; 107.166,90.937 107.166,99.437 ; 107.666,92.237 107.866,92.237 ; 107.666,96.437 107.866,96.437 ; 107.666,97.937 107.866,97.937 ; 111.962,89.977 111.962,98.077 122.362,98.077 122.362,89.977 ; 111.962,90.977 110.462,90.977 110.462,89.977 123.862,89.977 123.862,90.977 122.362,90.977 ; 111.962,96.076 110.462,96.076 110.462,96.876 111.962,96.876 ; 112.698,98.077 112.698,98.49 121.638,98.49 121.638,98.077 ; 113.112,98.077 113.112,98.477 121.212,98.477 121.212,98.077 ; 113.998,98.477 113.998,98.49 ; 114.287,98.077 114.287,98.477 ; 120.037,98.077 120.037,98.477 ; 120.338,98.477 120.338,98.49 ; 122.362,96.076 123.862,96.076 123.862,96.876 122.362,96.876
  text "LA" at 125.247,74.905 h2 r90
  text "LB" at 126.689,69.482 h2 r90
Bottom Overlay:
  drawing of 260 lines, arcs and shapes, not listed
  text "+" at 107.417,88.303 h2
  text "+" at 92.748,87.998 h2
  text "+" at 99.974,87.871 h2
  text "LA" at 126.136,79.311 h2
  text "LB" at 126.733,70.244 h2
  text "B-" at 104.153,68.644 h2
  text "B+" at 113.894,67.805 h2
Bottom Solder:
  rectangle: 104.394,79.299 106.489,82.131
  rectangle: 96.977,81.458 102.489,84.29
  rectangle: 98.151,79.286 105.346,83.875

## Text inside footprints (layer, text, board x,y; h text height)
JP1: Mechanical 15 "ID1" at 115.201,90.625 h0.7 r90; Mechanical 15 "L1P" at 115.785,90.625 h0.7 r90; Mechanical 15 "L1N" at 116.369,90.625 h0.7 r90; Mechanical 15 "PWR" at 116.979,90.625 h0.7 r90; Mechanical 15 "ID0" at 117.576,90.625 h0.7 r90; Mechanical 15 "L0N" at 118.173,90.625 h0.7 r90; Mechanical 15 "L0P" at 118.795,90.625 h0.7 r90; Mechanical 15 "GND" at 119.366,90.625 h0.7 r90
U5: Bottom Overlay "(0)" at 97.387,74.589 h0.7